# EAGLE board miniconnector4 (EAGLE 5.10)
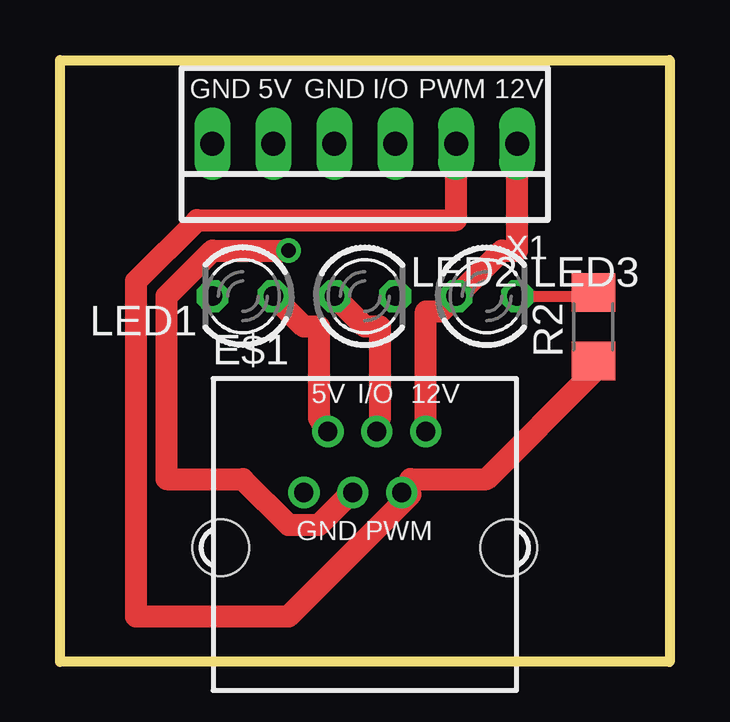
[diagram p0: board, top side]
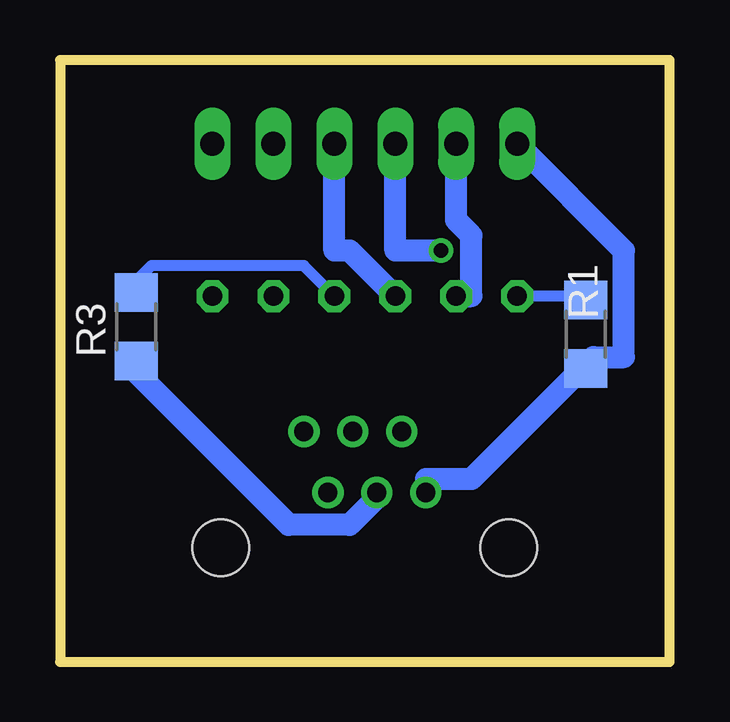
[diagram p1: board, bottom side, seen from below]

Size 25.4 x 25.08 mm. Coordinates in mm from the lower left corner, seen from the top.
Outline: 0,25.08 25.4,25.08 25.4,0 0,0 0,25.08
Copper layers (1*16): Top 0.035mm / dielectric 1.5mm / Bottom 0.035mm
Design rules "default": minimum track width 10mil, minimum drill 24mil, track to track 8mil, track to pad 8mil, pad to pad 8mil, via to via 8mil, smd to smd 8mil, copper to edge 40mil, drill to drill 8mil, minimum pad ring 10mil, minimum via ring 8mil, stop-mask expansion 4mil, vias tented up to drill 0mil, thermal gap 10mil
Net classes: 0 default: width 0.457 mm; 1 power: width 0.914 mm
Milling: 4 lines

## Footprints (pad centres in the part's own frame; a part is rotated, then mirrored left to right if it is on the bottom)
YH-55-10 = drill 0.8 pad 1.3 round: 1 -2.54,2.3; 2 -1.54,4.84; 3 -0.5,2.3; 4 0.5,4.84; 5 1.54,2.3; 6 2.54,4.84 | hole 2.36: -6,0; 6,0
LED3MM = drill 0.813 octagon: A -1.27,0; K 1.27,0
R1206 = smd 1.6 x 1.803: 1 -1.422,0; 2 1.422,0
22-23-2061 = drill 1 long: 1 -6.35,0; 2 -3.81,0; 3 -1.27,0; 4 1.27,0; 5 3.81,0; 6 6.35,0

## Placement (x,y rotation side)
E$1  [YH-55-10]  12.7,4.76 0 top
LED1  [LED3MM]  7.62,15.24 180 top
LED2  [LED3MM]  12.7,15.24 0 top
LED3  [LED3MM]  17.78,15.24 0 top
R1  1K  [R1206]  3.49,13.65 90 bottom
R2  1K  [R1206]  22.23,13.97 90 top
R3  1K  [R1206]  22.23,13.97 90 bottom
X1  [22-23-2061]  12.7,21.59 180 top

## Library data of the parts
E$1 = lpatiny
LED1-LED3 = led
R1-R3 = smd-ipc
X1 = con-molex; MF: MOLEX; MPN: 22-23-2061; OC_FARNELL: 1462922; OC_NEWARK: 27C1933

## Nets
S$1 [power]: E$1.1 R1.1 X1.6
S$2: LED1.K R1.2
S$3 [power]: E$1.2 LED1.A X1.5
S$4 [power]: E$1.3 R3.1 X1.4
S$5 [power]: E$1.4 LED2.A X1.3
S$6 [power]: E$1.5 R2.1 X1.2
S$7 [power]: E$1.6 LED3.A X1.1
S$8: LED2.K R3.2
S$9: LED3.K R2.2

## Tracks (layer width: path | path; a pad name or v marks a point on that pad's centre or on a via)
S$1
  Bottom 0.914: E$1.1 10.16,7.62 8.26,7.62 3.81,12.07 R1.1 3.18,12.7 1.9,12.7 1.9,17.14 X1.6
S$2
  Bottom 0.457: LED1.K 3.81,15.24 R1.2
S$3
  Top 0.914: LED1.A 10.16,13.97 10.79,13.97 10.79,10.16 E$1.2
  Bottom 0.914: X1.5 8.89,18.41 8.26,17.78 8.26,15.24 LED1.A
S$4  (via drill 0.61)
  Top 0.914: v9.53,17.14 6.35,17.14 4.45,15.24 4.45,7.62 7.62,7.62 9.53,5.71 10.79,5.71 12.07,6.99 E$1.3
  Bottom 0.914: R3.1 22.23,12.07 15.88,5.71 13.34,5.71 12.07,6.99 E$1.3 | X1.4 11.43,17.14 v9.53,17.14
S$5
  Top 0.914: LED2.A 12.7,13.97 13.34,13.97 13.34,10.16 E$1.4
  Bottom 0.914: X1.3 13.97,17.14 13.34,17.14 LED2.A
S$6
  Top 0.914: R2.1 22.23,12.07 17.78,7.62 14.61,7.62 E$1.5 14.61,6.99 9.53,1.9 3.18,1.9 3.18,15.88 5.71,18.41 16.51,18.41 X1.2
S$7
  Top 0.914: E$1.6 15.24,14.61 15.88,14.61 LED3.A 18.41,17.14 19.05,17.14 X1.1
S$8
  Bottom 0.457: LED2.K 15.24,16.51 21.59,16.51 22.23,15.88 R3.2
S$9
  Top 0.457: LED3.K 22.23,15.24 R2.2

## Text on the board
tPlace: GND | 5V | GND | I/O | PWM | 12V